# EAGLE board OSSM_Main_PCB (EAGLE 9.6.2)
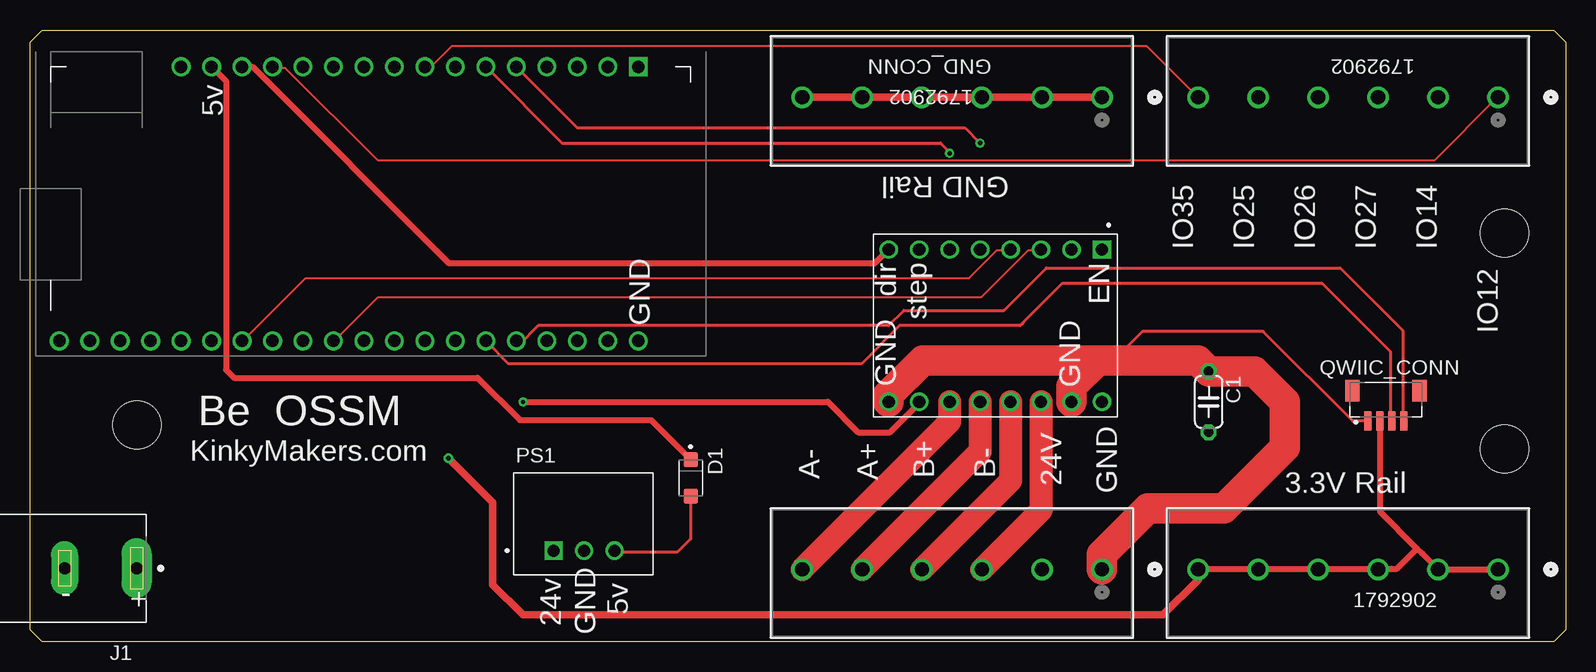
[diagram p0: board, top side]
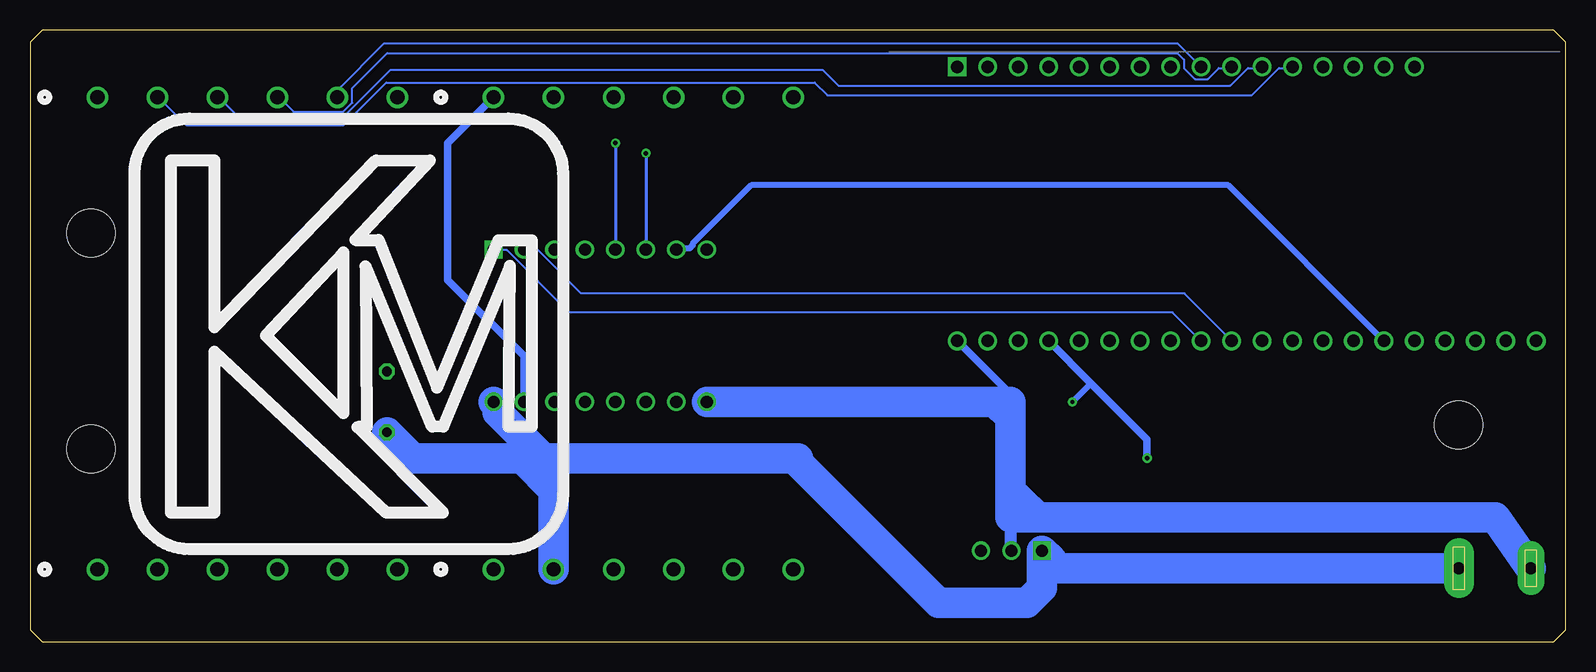
[diagram p1: board, bottom side, seen from below]

Size 128 x 51 mm. Coordinates in mm from the lower left corner, seen from the top.
Outline: 0,50 1,51 127,51 128,50 128,1 127,0 1,0 0,1 0,50
Copper layers (1*16): Top 0.035mm / dielectric 1.5mm / Bottom 0.035mm
Design rules "default": minimum track width 6mil, minimum drill 0.35mm, track to track 6mil, track to pad 6mil, pad to pad 6mil, via to via 6mil, smd to smd 6mil, copper to edge 40mil, drill to drill 6mil, minimum pad ring 10mil, minimum via ring 8mil, stop-mask expansion 4mil, vias tented up to drill 0mil, thermal gap 10mil
Holes 4 mm at 122.92,34.07 122.92,16.07 8.92,18.07

## Footprints (pad centres in the part's own frame; a part is rotated, then mirrored left to right if it is on the bottom)
CONN_1792902_PXC = drill 1.194 pad 1.702: 1 0,0; 2 5.004,0; 3 10.008,0; 4 15.011,0; 5 19.99,0; 6 24.994,0
C050-024X044 = drill 0.813 octagon: 1 -2.54,0; 2 2.54,0
SODFL3617X108N = smd 1.25 x 1.16: A 1.53,0; C -1.53,0
CUI_PJ-037AH = drill 1 pad 2.5 long: 1 0,0 | drill 1 pad 2.25 long: 2 6,0
CONV_R-78E5.0-0.5 = drill 1 square: 1 -2.54,-2.25 | drill 1: 2 0,-2.25; 3 2.54,-2.25
CONN_BM04B-SRSS-TB(LF)(SN) = smd 0.6 x 1.55: 1 -1.5,-1.325; 2 -0.5,-1.325; 3 0.5,-1.325; 4 1.5,-1.325 | smd 1.2 x 1.8: S1 -2.8,1.2; S2 2.8,1.2
MODULE_A4988_STEPPER_MOTOR_DRIVER_CARRIER = drill 1.02 square: 1 -6.35,8.89 | drill 1.02: 2 -6.35,6.35; 3 -6.35,3.81; 4 -6.35,1.27; 5 -6.35,-1.27; 6 -6.35,-3.81; 7 -6.35,-6.35; 8 -6.35,-8.89; 9 6.35,-8.89; 10 6.35,-6.35; 11 6.35,-3.81; 12 6.35,-1.27; 13 6.35,1.27; 14 6.35,3.81; 15 6.35,6.35; 16 6.35,8.89
LOLIN32_PRODUCTION = drill 1.04 square: 1 1.27,48.97 | drill 1.04: 2 1.27,46.43; 3 1.27,43.89; 4 1.27,41.35; 5 1.27,38.81; 6 1.27,36.27; 7 1.27,33.73; 8 1.27,31.19; 9 1.27,28.65; 10 1.27,26.11; 11 1.27,23.57; 12 1.27,21.03; 13 1.27,18.49; 14 1.27,15.95; 15 1.27,13.41; 16 1.27,10.87; 17 24.13,48.97; 18 24.13,46.43; 19 24.13,43.89; 20 24.13,41.35; 21 24.13,38.81; 22 24.13,36.27; 23 24.13,33.73; 24 24.13,31.19; 25 24.13,28.65; 26 24.13,26.11; 27 24.13,23.57; 28 24.13,21.03; 29 24.13,18.49; 30 24.13,15.95; 31 24.13,13.41; 32 24.13,10.87; 33 24.13,8.33; 34 24.13,5.79; 35 24.13,3.25; 36 24.13,0.71

## Placement (x,y rotation side)
3.3V_CONN  1792902  [CONN_1792902_PXC]  122.38,6.02 180 top
C1  [C050-024X044]  98.25,19.99 270 top
D1  SS24FL  [SODFL3617X108N]  55.07,13.64 270 top
GND_CONN  1792902  [CONN_1792902_PXC]  89.36,45.39 180 top
IO_CONN  1792902  [CONN_1792902_PXC]  122.38,45.39 180 top
J1  PJ-037AH  [CUI_PJ-037AH]  8.89,6.11 180 top
MTR_CONN  1792902  [CONN_1792902_PXC]  89.36,6.02 180 top
PS1  R-78E5.0-0.5  [CONV_R-78E5.0-0.5]  46.18,9.83 0 top
QWIIC_CONN  BM04B-SRSS-TB(LF)(SN)  [CONN_BM04B-SRSS-TB(LF)(SN)]  113.03,19.72 0 top
STEPPER  A4988_STEPPER_MOTOR_DRIVER_CARRIER  [MODULE_A4988_STEPPER_MOTOR_DRIVER_CARRIER]  80.47,26.34 270 top
U1  LOLIN32_PRODUCTION  [LOLIN32_PRODUCTION]  1.73,49.2 270 top

## Library data of the parts
3.3V_CONN GND_CONN IO_CONN MTR_CONN = @DT-TRAINER; ARTICLE_DESCRIPTION: PTS 1,5/ 6-5,0-H; BUILT_BY: EMA_Cory; CONTACT_TYPE: Unknown; COPYRIGHT: Copyright (C) 2018 Accelerated Designs. All rights reserved; MANUFACTURER_PART_NUMBER: 1792902; NUMBER_OF_CONNECTION: 6; NUMBER_OF_POSITION_PER_ROW: 6; NUMBER_OF_POTENTIALS: 6; NUMBER_OF_ROWS: 1; NUMBER_OF_SOLDER_PINS_PER_POTENTIALS: 1; PITCH__MM_: 5; PLUG_SYSTEM: Unknown; PRODUCTTYP: Printed circuit board terminal; PRODUCT_FAMILY: PTS 1,5/..-H; SOLDER_PIN_LENGTH__MM_: 2.5; SOURCELIBRARY: Phoenix_Contact_2020-03-19; VENDOR: Phoenix Contact
C1 = rcl; SPICEPREFIX: C
D1 = SS24FL; DESCRIPTION: Diode Schottky 40V 2A Surface Mount SOD-123F; DIGI-KEY_PART_NUMBER: SS24FLCT-ND; MF: ON Semiconductor; MP: SS24FL; PACKAGE: SOD-123 FL-2 ON Semiconductor; PURCHASE-URL: https://pricing.snapeda.com/search/part/SS24FL/?ref=eda
J1 = PJ-037AH; MANUFACTURER: CUI Devices; MAXIMUM_PACKAGE_HEIGHT: 11.2 mm; PARTREV: 1.05; STANDARD: Manufacturer Recommendations
PS1 = R-78E5.0-0.5; DESCRIPTION: Switching regulator module - DC/DC converter . Single Output. 7.0V to 28.0V input voltage range and 5 V output voltage range; DIGI-KEY_PART_NUMBER: 945-1648-5-ND; MF: Recom Power; MP: R-78E5.0-0.5; PACKAGE: SIP-3 Recom Power; PURCHASE-URL: https://pricing.snapeda.com/search/part/R-78E5.0-0.5/?ref=eda
QWIIC_CONN = BM04B-SRSS-TB_LF__SN_; DESCRIPTION: Connector Header Surface Mount 4 position 0.039 (1.00mm); DIGI-KEY_PART_NUMBER: 455-1790-1-ND; MF: JST Sales; MP: BM04B-SRSS-TB(LF)(SN); PACKAGE: None; PURCHASE-URL: https://pricing.snapeda.com/search/part/BM04B-SRSS-TB(LF)(SN)/?ref=eda
STEPPER = A4988_STEPPER_MOTOR_DRIVER_CARRIER; AVAILABILITY: Unavailable; DESCRIPTION: Stepper Motor Driver; MF: Pololu; MP: A4988 STEPPER MOTOR DRIVER CARRIER; PACKAGE: None; PRICE: None
U1 = $DT-TRAINER

## Nets
3_3V: 3.3V_CONN.1 3.3V_CONN.2 3.3V_CONN.3 3.3V_CONN.4 3.3V_CONN.5 3.3V_CONN.6 QWIIC_CONN.2 STEPPER.10 U1.1 U1.20 U1.29
5V: D1.C U1.15
21_SDA: QWIIC_CONN.3 U1.22
22_SCL: QWIIC_CONN.4 U1.21
24V: C1.2 J1.1 MTR_CONN.2 PS1.1 STEPPER.16
GND: C1.1 GND_CONN.1 GND_CONN.2 GND_CONN.3 GND_CONN.4 GND_CONN.5 GND_CONN.6 J1.2 MTR_CONN.1 PS1.2 QWIIC_CONN.1 STEPPER.9 STEPPER.15 U1.16 U1.17 U1.23 U1.24 U1.34
IO32: STEPPER.5 U1.5
IO33: STEPPER.6 U1.6
N$1: D1.A PS1.3
N$2: STEPPER.1 U1.25
N$3: STEPPER.2 U1.26
N$4: STEPPER.3 U1.27
N$5: STEPPER.4 U1.30
N$6: STEPPER.7 U1.31
N$7: STEPPER.8 U1.14
N$8: MTR_CONN.6 STEPPER.11
N$9: MTR_CONN.5 STEPPER.12
N$10: MTR_CONN.4 STEPPER.13
N$11: MTR_CONN.3 STEPPER.14
N$12: IO_CONN.1 U1.13
N$13: IO_CONN.2 U1.12
N$14: IO_CONN.3 U1.11
N$15: IO_CONN.4 U1.10
N$16: IO_CONN.5 U1.9
N$17: IO_CONN.6 U1.8

## Tracks (layer width: path | path; a pad name or v marks a point on that pad's centre or on a via)
3_3V  (via drill 0.35)
  Top 0.152: 3.3V_CONN.6 97.49,6.07 102.36,6.07 3.3V_CONN.5 102.52,6.07 107.24,6.07 3.3V_CONN.4 107.39,6.07 112.27,6.07 3.3V_CONN.3 112.42,6.07 113.49,6.07 | 112.62,18.35 QWIIC_CONN.2 | 115.6,7.72 115.62,7.75 | 122.33,6.07 3.3V_CONN.1
  Top 0.508: 3.3V_CONN.6 97.44,6.07 113.49,6.07 113.95,6.07 115.6,7.72 | 122.33,6.07 122.28,6.02 3.3V_CONN.2 116.08,7.31 116.06,7.31 115.62,7.75 112.53,10.84 QWIIC_CONN.2 | v41.1,19.99 66.5,19.99 69.04,17.45 71.71,17.45 74.12,19.86 STEPPER.10
  Top 0.61: v34.88,15.29 38.56,11.61 38.56,4.75 41.1,2.21 94.44,2.21 97.39,5.16 3.3V_CONN.6
  Bottom 0.508: 39.55,21.54 v41.1,19.99
  Bottom 0.61: U1.20 39.55,21.54 34.88,16.87 v34.88,15.29
5V
  Top 0.508: U1.15 16.34,46.73 16.34,22.66 17,22 37.31,22 40.85,18.47 51.77,18.47 D1.C
21_SDA
  Top 0.152: 82.86,26.67 82.77,26.58 | 113.39,18.5 QWIIC_CONN.3
  Top 0.254: U1.22 39.91,23.16 | 39.91,23.16 | 82.86,26.67 86.07,29.88 107.7,29.88 113.39,24.19 113.39,18.5 | 82.77,26.58 82.53,26.34 72.47,26.34 69.29,23.16 39.91,23.16
22_SCL
  Top 0.152: 40.82,24.79 40.64,24.97 U1.21 | 114.45,18.5 QWIIC_CONN.4
  Top 0.254: 40.82,24.79 42.37,26.34 71.58,26.34 72.85,27.61 81.18,27.61 84.72,31.15 109.22,31.15 114.45,25.92 114.45,18.5
24V
  Bottom 0.152: 88.24,19.99 STEPPER.16 | 43.74,7.39 43.69,7.44 PS1.1
  Bottom 2.54: 85.19,15.26 89.01,19.08 89.01,19.64 STEPPER.16 | 85.19,15.26 63.98,15.26 63.98,14.93 52.26,3.21 44.91,3.21 43.64,4.48 43.64,7.17 PS1.1 | 85.19,15.26 87,15.26 | 87,15.26 96.06,15.26 C1.2 | MTR_CONN.2 84.36,12.62 87,15.26 | PS1.1 42.81,6.75 | PS1.1 42.17,6.11 J1.1
GND
  Top 0.152: GND_CONN.6 GND_CONN.5 GND_CONN.4 GND_CONN.3 GND_CONN.2 GND_CONN.1 | 7.57,24.97 U1.34 | 86.87,19.99 STEPPER.15
  Top 0.254: QWIIC_CONN.1 110.26,18.4 102.83,25.83 102.8,25.86 92.74,25.86 90.66,23.77 90.02,23.14
  Top 0.61: GND_CONN.1 GND_CONN.6
  Top 1.27: 88.55,23.42 86.85,23.42 86.82,23.45 | STEPPER.15 86.82,22.53 88.06,23.77 90.66,23.77
  Top 2.54: STEPPER.9 71.58,20.61 74.42,23.45 86.82,23.45 89.01,23.45 86.82,21.26 STEPPER.15 | 88.55,23.42 97.36,23.42 C1.1 102.06,22.53 104.6,19.99 104.6,16.18 99.52,11.1 93.17,11.1 89.36,7.29 MTR_CONN.1
  Bottom 0.152: 89.46,45.39 GND_CONN.1 | 46.28,18.72 46.28,19.99 | 46.28,8 46.28,7.59 PS1.2 | 50.7,24.97 U1.17 | 86.87,19.99 STEPPER.15
  Bottom 0.61: U1.17 46.28,20.65 46.28,20 46.28,19.99 | STEPPER.15 86.82,23.8 93.17,30.15 93.17,41.58 GND_CONN.1
  Bottom 1.016: 46.28,10.37 46.28,8
  Bottom 2.54: J1.2 5.87,10.37 44,10.37 | 44,10.37 46.28,10.37 46.28,12 | STEPPER.9 47.55,19.99 | 47.55,19.99 46.28,19.99 | 46.28,12 46.28,18.72 | 46.28,18.72 46.28,20 | 46.28,18.72 47.55,19.99 | 44,10.37 45.63,12 46.28,12
IO32  (via drill 0.35)
  Top 0.254: U1.5 45.62,42.85 77.93,42.85 v79.2,41.58
  Bottom 0.254: v79.2,41.58 STEPPER.5
IO33  (via drill 0.35)
  Top 0.254: U1.6 44.35,41.58 75.9,41.58 76.66,40.82 v76.66,40.71
  Bottom 0.254: v76.66,40.71 STEPPER.6
N$1
  Top 0.152: 48.72,7.44 PS1.3
  Top 0.254: D1.A 55.07,8.56 53.95,7.44 48.72,7.44
N$2
  Bottom 0.152: STEPPER.1 89.31,32.64 88.24,32.64 83.06,27.46 32.77,27.46 30.43,25.12 U1.25
N$3
  Bottom 0.152: STEPPER.2 86.72,32.64 85.65,32.64 82.05,29.03 31.75,29.03 27.84,25.12 U1.26
N$4
  Top 0.152: STEPPER.3 84.28,32.64 83.21,32.64 79.3,28.73 29.01,28.73 25.4,25.12 U1.27
N$5
  Top 0.152: STEPPER.4 81.69,32.64 80.62,32.64 78.29,30.3 22.96,30.3 17.78,25.12 U1.30
N$6
  Bottom 0.508: U1.31 28.12,38.05 67.88,38.05 72.75,33.17 72.75,33.04 73,32.79 74.07,32.79 74.07,32.74 STEPPER.7
N$7
  Top 0.152: 71.48,32.79 STEPPER.8
  Top 0.508: U1.14 18.54,47.93 34.95,31.52 70.41,31.52 STEPPER.8
N$8
  Top 1.9: STEPPER.11 76.66,18.31 MTR_CONN.6
N$9
  Top 1.9: STEPPER.12 79.2,15.85 MTR_CONN.5
N$10
  Top 1.9: STEPPER.13 81.74,13.41 MTR_CONN.4
N$11
  Top 1.9: STEPPER.14 84.28,10.95 MTR_CONN.3
N$12
  Top 0.152: U1.13 20.22,47.83 21.29,47.83 29.01,40.11 117.05,40.11 122.33,45.39 IO_CONN.1
N$13
  Bottom 0.152: U1.12 22.81,47.83 23.88,47.83 26.16,45.54 61.52,45.54 62.59,46.61 98.3,46.61 101.86,43.05 114.96,43.05 117.3,45.39 IO_CONN.2
N$14
  Bottom 0.152: U1.11 25.4,47.83 26.47,47.83 27.94,46.36 60.61,46.36 61.93,47.68 97.94,47.68 102.01,43.61 110.49,43.61 112.27,45.39 IO_CONN.3
N$15
  Bottom 0.152: U1.10 27.84,47.83 28.91,47.83 29.82,46.91 30.89,46.91 31.8,47.83 31.8,48.54 32.34,49.07 98.22,49.07 101.15,46.15 101.15,44.93 101.91,44.17 106.02,44.17 107.24,45.39 IO_CONN.4
N$16
  Bottom 0.152: U1.9 32.34,49.89 98.46,49.89 102.39,45.96 IO_CONN.5
N$17
  Top 0.152: U1.8 33.02,47.98 33.48,47.98 35.13,49.63 93.09,49.63 97.34,45.39 IO_CONN.6

## Text on the board
tPlace: GND Rail | IO35 | IO25 | IO26 | IO27 | IO14 | dir | EN | step | IO12 | Be OSSM | A- | B+ | B- | A+ | GND | 3.3V Rail
tNames: 5v | GND | GND | GND | KinkyMakers.com | 24V | - | + | 5v | 24v | GND